# EAGLE board V1 (EAGLE 9.5.1)
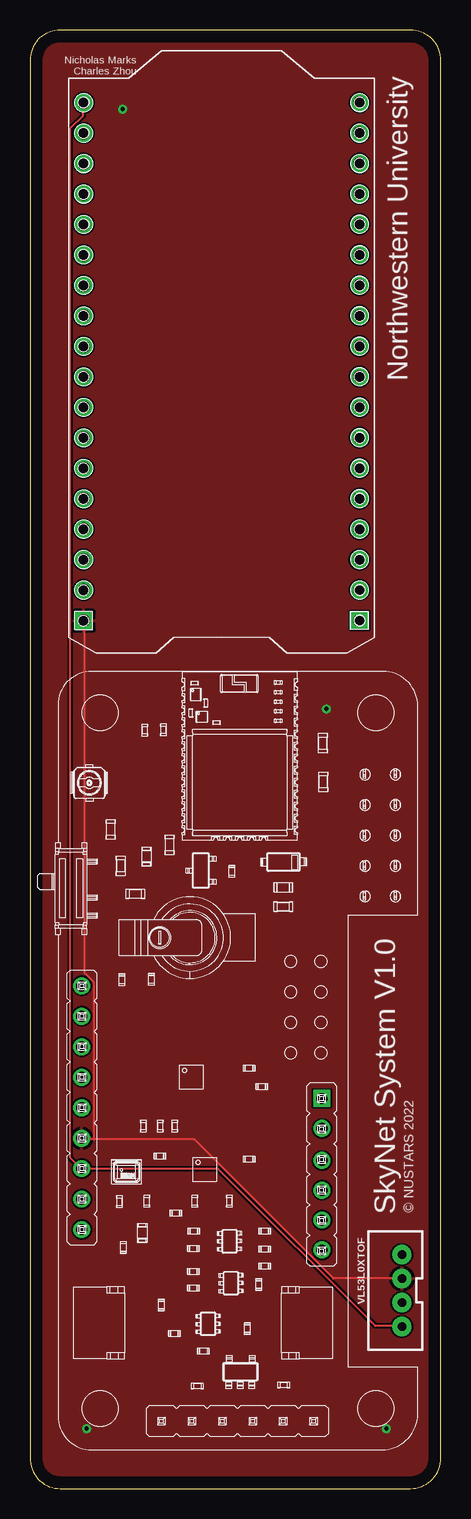
[diagram p0: board, top side]
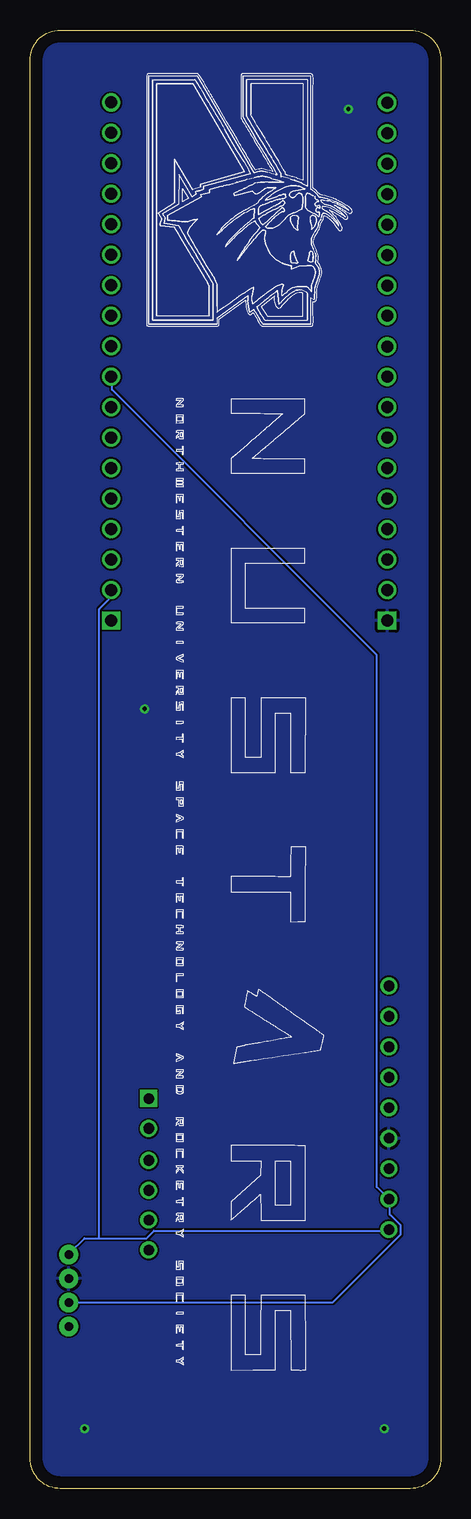
[diagram p1: board, bottom side, seen from below]

Size 34.27 x 121.59 mm. Coordinates in mm from the lower left corner, seen from the top.
Outline: 0,119.05 0,2.54 arc90 2.54,0 31.73,0 arc90 34.27,2.54 34.27,119.05 arc90 31.73,121.59 2.54,121.59 arc90 0,119.05
Copper layers (1*16): Top 0.035mm / dielectric 1.5mm / Bottom 0.035mm
Design rules "default": minimum track width 6mil, minimum drill 0.35mm, track to track 6mil, track to pad 6mil, pad to pad 6mil, via to via 6mil, smd to smd 6mil, copper to edge 40mil, drill to drill 6mil, minimum pad ring 10mil, minimum via ring 8mil, stop-mask expansion 4mil, vias tented up to drill 0mil, thermal gap 10mil

## Footprints (pad centres in the part's own frame; a part is rotated, then mirrored left to right if it is on the bottom)
BERRYGPSV4 = drill 0.9: 3.3V 137.668,-50.8; 5V 137.668,-66.04; CS 157.709,-62.763; GND 137.668,-58.42; INT2 157.709,-57.607; RST_N 137.668,-48.26; SCL3V 137.668,-55.88; SCL5V 137.668,-63.5; SD0 157.709,-65.253; SD1 157.709,-67.742; SDA3V 137.668,-53.34; SDA5V 137.668,-60.96; SPC 157.709,-60.274; T_PULSE 137.668,-45.72 | drill 0.9 square: INT1 157.709,-55.118
WIFI-LORA32-V2 = drill 1 pad 1.5: 3V3 -17.808,10.766; 3V3_2 -15.276,10.772; 5V -17.794,-12.254; GPIO0 -2.559,-12.253; GPIO2 15.223,-12.256; GPIO4 17.762,-12.257; GPIO5 10.141,-12.258; GPIO12 17.748,10.763; GPIO13 20.29,10.764; GPIO14 15.209,10.764; GPIO15 12.684,-12.254; GPIO16 22.841,-12.257; GPIO17 20.304,-12.256; GPIO18 7.598,-12.256; GPIO19 2.519,-12.256; GPIO23 5.061,-12.255; GPIO25 7.584,10.764; GPIO26 10.127,10.762; GPIO27 12.67,10.766; GPIO32 2.505,10.764; GPIO33 5.047,10.765; GPIO34 -2.573,10.767; GPIO35 -0.034,10.765; GPIO36 -12.737,10.769; GPIO37 -10.194,10.764; GPIO38 -7.656,10.765; GPIO39 -5.116,10.763; RST -5.102,-12.257; RX -10.18,-12.256; SCL -0.02,-12.255; SDA 22.827,10.763; TX -7.642,-12.255; VEXT -15.262,-12.248; VEXT_2 -12.723,-12.251 | drill 1 pad 1.5 square: GND -20.359,10.764; GND_2 -20.345,-12.256
JST-4-PTH-VERT = drill 0.7 pad 1.6: 1 -3,-0.55; 2 -1,-0.55; 3 1,-0.55; 4 3,-0.55

## Placement (x,y rotation side)
BERRYGPSIMU1  BERRYGPSV4  [BERRYGPSV4]  -133.35,87.63 0 top
LORA1  WIFI-LORA32-V2  [WIFI-LORA32-V2]  15.24,92.71 90 top
VL53L0XTOF  [JST-4-PTH-VERT]  30.48,16.51 90 top

## Library data of the parts
BERRYGPSIMU1 = berrygpsv4
LORA1 = wifilora32v2
VL53L0XTOF = SparkFun-Connectors; PROD_ID: CONN-13251

## Nets
5V: BERRYGPSIMU1.5V LORA1.5V VL53L0XTOF.4
GND: BERRYGPSIMU1.GND LORA1.GND VL53L0XTOF.3
SCL: BERRYGPSIMU1.SCL5V LORA1.SCL VL53L0XTOF.2
SDA: BERRYGPSIMU1.SDA5V LORA1.SDA VL53L0XTOF.1

## Tracks (layer width: path | path; a pad name or v marks a point on that pad's centre or on a via)
5V
  Bottom 0.152: 28.5,20.88 29.72,20.88 30.94,19.66 VL53L0XTOF.4 | 28.5,20.88 24.54,20.88 23.93,21.49 4.42,21.49 BERRYGPSIMU1.5V | 28.5,20.88 28.5,73.3 27.58,74.22 27.58,74.83 LORA1.5V
GND  (via drill 0.35)
  Top 0.152: 5.33,29.11 13.72,29.11 25.3,17.53 30.94,17.53 VL53L0XTOF.3 | 5.33,29.11 4.42,29.11 BERRYGPSIMU1.GND | 5.33,29.11 5.33,42.22 4.57,42.98 4.57,72.24 LORA1.GND
  other vias: 4.72,5 29.72,5 24.72,65 7.72,115
  pour Bottom: -11.28,125.8 -9.03,-10.05 58.17,-6.95
  pour Top: -14.38,127.9 -15.33,-16.5 58.17,-15.2 53.82,130.65
  pour Bottom: -9.28,125 -8.28,-6 43.72,-8 42.72,131
SCL
  Bottom 0.152: VL53L0XTOF.2 30.94,15.54 8.99,15.54 3.35,21.18 3.35,21.95 4.27,22.86 4.27,24.08 BERRYGPSIMU1.SCL5V 5.33,25.15 5.33,69.49 27.43,91.59 27.43,92.66 LORA1.SCL
SDA
  Top 0.152: VL53L0XTOF.1 30.94,13.56 28.8,13.56 15.7,26.67 BERRYGPSIMU1.SDA5V 4.27,26.67 3.35,27.58 3.35,113.39 4.42,114.45 4.42,115.52 LORA1.SDA

## Text on the board
tPlace: Nicholas Marks / Charles Zhou | Northwestern University | SkyNet System V1.0 | © NUSTARS 2022